# Altium PCB SymphonyLights_SOC v1.2.PcbDoc
Units mm, origin at the board's own origin, x right, y up, seen from the top; angles counter-clockwise.
Board outline 57 x 29 mm, 2 copper layers (Top Layer, Bottom Layer); 55 components, 26 nets, 150 pads, 149 vias.
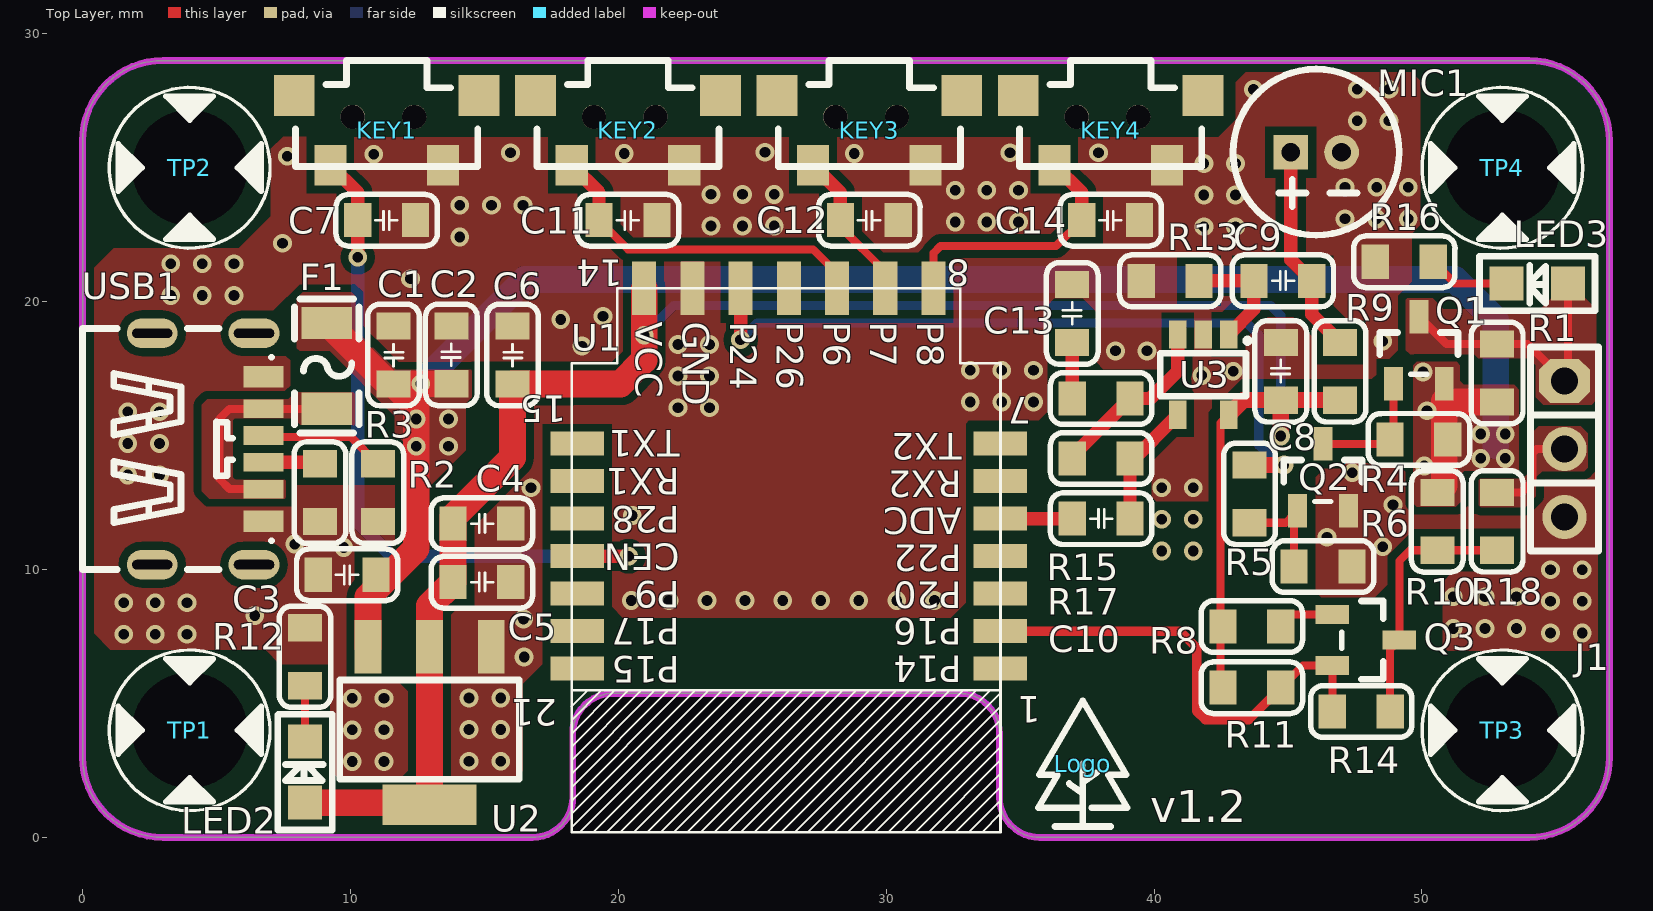
[diagram p0: Top Layer view]
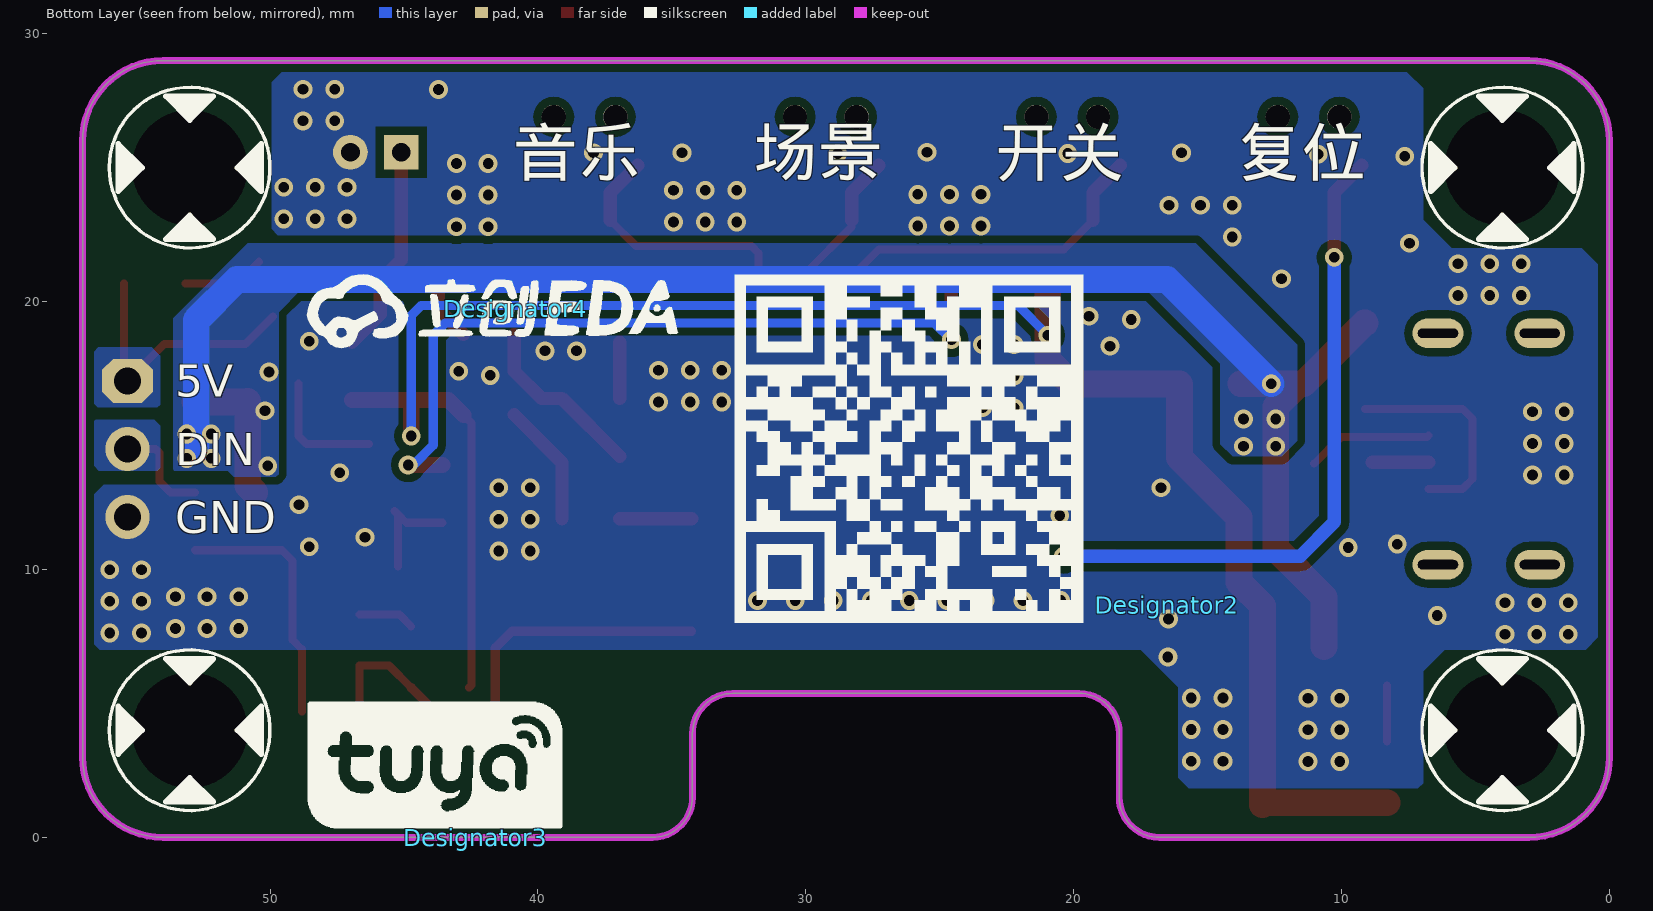
[diagram p1: Bottom Layer view, seen from below]

## Layer stack, top to bottom
Top Layer: signal copper 0.0356
Dielectric: dielectric 0.32, FR-4, Dk 4.8
Bottom Layer: signal copper 0.0356

## Board outline
3,0 16.8,0 ccw(c16.803,1.497) 18.3,1.504 18.3,3.873 cw(c19.797,3.88) 19.8,5.377 32.73,5.377 32.73,5.376 cw(c32.733,3.879) 34.23,3.872 34.23,1.503 ccw(c35.727,1.497) 35.73,-0.001 54,-0.001 54,0 ccw(c54,3) 57,3 57,26 ccw(c54,26) 54,29 3,29 ccw(c3,26) 0,26 0,3 ccw(c3,3)

## Design rules (kind name [scope] priority, off if disabled: settings)
Clearance [All] p1: gap=0.3
ComponentClearance [All] p1: gap=0 collisioncheckmode=3 verticalgap=0 showdistances=FALSE
HoleSize [All] p1: absolutevalues=TRUE maxlimit=100 minlimit=0.025 maxpercent=80.000 minpercent=20.000
MinimumSolderMaskSliver [All] p1: minsoldermaskwidth=0
PolygonConnect [All] p1: connectstyle=Direct reliefconductorwidth=0.254 reliefentries=4 polygonreliefangle="90 Angle"
RoutingVias [All] p1: holewidth=0.711 width=1.27 viastyle="Through Hole" minholewidth=0.3 minwidth=0.6 maxholewidth=0.711 maxwidth=1.27
SilkToSilkClearance [All] p1: silktosilkclearance=0
SilkscreenOverComponentPads [All] p1: minsilkscreentomaskgap=0
SolderMaskExpansion [All] p1: expansion=0.102
Width [All] p1: maxlimit=2 minlimit=0.3 preferedwidth=0.3
23 further rules are at their usual default settings.

## Classes and differential pairs
component class "SymphonyLights_SOC v1.1": C1 C2 C3 C4 C5 C6 C7 C8 C9 C10 C11 C12 C13 C14 F1 J1 KEY1 KEY2 KEY3 KEY4 LED2 LED3 MIC1 Q1 Q2 Q3 R1 R2 R3 R4 R5 R6 R8 R9 R10 R11 R12 R13 R14 R15 R16 R17 R18 TP1 TP2 TP3 TP4 U1 U2 U3 USB1

## Components (designator, comment, footprint, x,y, rotation, side; value= is the part's Value field where it differs from the comment)
C1 "100nF" 0805C 11.608,18.009 r270 top
C2 "22uF" 0805C 13.767,18.011 r90 top
C3 "100nF" 0805C 9.881,9.804 r180 top
C4 "100nF" 0805C 14.91,11.709 r0 top
C5 "22uF" 0805C 14.91,9.525 r0 top
C6 "100nF" 0805C 16.053,18.009 r270 top
C7 "100nF" 0805C 11.352,23.038 r180 top
C8 "1uF" 0805C 44.729,17.399 r90 top
C9 "1uF" 0805C 44.806,20.777 r0 top
C10 "0R" 0805C 38.024,11.898 r0 top
C11 "100nF" 0805C 20.361,23.038 r180 top
C12 "100nF" 0805C 29.37,23.038 r180 top
C13 "0R" 0805C 36.944,19.558 r90 top
C14 "100nF" 0805C 38.378,23.038 r180 top
Designator2 "Comment" 二维码 16.517,8.683 r180 bottom
Designator3 "Comment" TUYA_LOGO_2 42.316,0.012 r180 bottom
Designator4 "Comment" LOGO_LCEDA-实心 40.828,19.756 r180 bottom
F1 "0466005.NRHF" 1206F 9.119,17.6 r90 top
J1 "KF301-3P" "SIP3 - 2.54" 55.321,17.04 r270 top
KEY1 "RESET" KEY-SMD_4P-L7.8-W2.8-P4.20-EH 11.354,26.391 r0 top
KEY2 "场景" KEY-SMD_4P-L7.8-W2.8-P4.20-EH 20.362,26.391 r0 top
KEY3 "音乐" KEY-SMD_4P-L7.8-W2.8-P4.20-EH 29.371,26.391 r0 top
KEY4 "开关" KEY-SMD_4P-L7.8-W2.8-P4.20-EH 38.379,26.391 r0 top
LED2 "LED" 0805LED 8.306,1.295 r90 top
LED3 "LED" 0805LED 55.448,20.676 r180 top
Logo "Comment" LOGO 37.338,2.743 r0 top
MIC1 "GMI6050P-66DB" MIC-TH_BD6.0-P1.90-D0.4-L-RD 46.05,25.578 r0 top
Q1 "SI2301" SOT-23(SOT-23-3) 49.886,18.191 r0 top
Q2 "S8050" SOT-23(SOT-23-3) 46.304,13.437 r0 top
Q3 "S8050" SOT-23(SOT-23-3) 47.904,7.366 r270 top
R1 "0R NC" 0805R 52.807,16.256 r90 top
R2 "5.1K" 0805R 11.024,13.949 r270 top
R3 "5.1K" 0805R 8.865,13.949 r270 top
R4 "100K" 0805R 48.807,14.859 r0 top
R5 "1k" 0805R 43.561,13.904 r270 top
R6 "10K" 0805R 45.226,10.109 r0 top
R8 "2K±5%" 0805R 42.57,7.874 r0 top
R9 "10K" 0805R 46.939,16.319 r90 top
R10 "2K±5%" 0805R 50.571,12.875 r270 top
R11 "2K±5%" 0805R 42.57,5.588 r0 top
R12 "1K" 0805R 8.306,5.664 r90 top
R13 "1K" 0805R 39.522,20.777 r0 top
R14 "NC/0R" 0805R 46.655,4.699 r0 top
R15 "1K" 0805R 36.944,16.383 r0 top
R16 "1K" 0805R 50.419,21.488 r180 top
R17 "100K" 0805R 36.944,14.14 r0 top
R18 "1K" 0805R 52.807,10.719 r90 top
TP1 "" M3螺丝孔 4,4 r0 top
TP2 "" M3螺丝孔 4,25 r0 top
TP3 "" M3螺丝孔 53,4 r0 top
TP4 "" M3螺丝孔 53,25 r0 top
U1 "WIFI_BLE_CBU" WIFI_BLE_CBU 26.365,20.498 r180 top
U2 "AMS1117-3.3" SOT-223 12.954,4.166 r180 top
U3 "LM321" SOT-23-5 41.834,17.271 r270 top
USB1 "TYPE-C 6P" TYPE-C-SMD_TYPE-C-6P 4.503,14.5 r270 top

## Footprints (in the part's own frame and the unit in brackets; to place one, negate y for a bottom-side part, rotate by r counter-clockwise, add the part's x,y. Pads: shape width x height; smd on the part's side, far side on the other; paste and mask are expansions set on the pad)
0805C [mil]
  rect 40x50 smd: 1(-42.5,0) 2(42.5,0)
  silkscreen extent -75,-38 75,38, body extent -39,-25 39,25, height 30
0805LED [mil]
  rect 50x50 smd: 1(0,0) 2(90,0)
  silkscreen extent -40,-40 130,40, body extent 6,-25 84,24, height 30
0805R [mil]
  rect 40x50 smd: 1(0,0) 2(85,0)
  silkscreen extent -32,-38 117,38, body extent 3,-25 81,25, height 22
1206F [mm]
  rect 1.2x1.9 smd: 1(-1.6,0) 2(1.6,0)
  silkscreen extent -2.5,-1.2 2.5,1.2
KEY-SMD_4P-L7.8-W2.8-P4.20-EH [mil]
  rect 47.2x60 smd: 1(-82.7,-51.15) 2(82.7,-51.15)
  rect 60x60 smd: 3(-135.8,51.15) 3(135.8,51.15)
  round 35.43 hole 35.43 unplated: ""(-50,19.95) ""(40.55,19.95)
  silkscreen extent -134,-53 134,103
LOGO [mm]
  silkscreen extent -1.66,-2.34 1.66,2.36
LOGO_LCEDA-实心 [mm]
  silkscreen extent -7.77,-1.49 6.06,1.25
M3螺丝孔 [mm]
  round 3.5 hole 4.3 unplated: ""(0,0)
  Top Layer pour cut-out: -3.048,0 -2.751,-1.302 -1.918,-2.345 -0.716,-2.925 0.62,-2.925 1.822,-2.345 2.655,-1.302 2.952,0 2.952,0 2.655,1.302 1.822,2.345 0.62,2.925 -0.716,2.925 -1.918,2.345 -2.751,1.302 -3.048,0
  Bottom Layer pour cut-out: -3.048,0 -2.751,-1.302 -1.918,-2.345 -0.716,-2.925 0.62,-2.925 1.822,-2.345 2.655,-1.302 2.952,0 2.952,0 2.655,1.302 1.822,2.345 0.62,2.925 -0.716,2.925 -1.918,2.345 -2.751,1.302 -3.048,0
  silkscreen extent -3,-3 3,3
MIC-TH_BD6.0-P1.90-D0.4-L-RD [mm]
  rect 1.3x1.3 hole 0.7: 1(-0.95,0)
  round 1.3 hole 0.7: 2(0.95,0)
  silkscreen extent -3.1,-3.1 3.1,3.1
"SIP3 - 2.54" [mil]
  oct 65x75 hole 39.37: 1(0,0)
  round 65 hole 39.37: 2(100,0) 3(200,0)
  silkscreen extent -50,-50 250,50
SOT-23(SOT-23-3) [mm]
  rect 0.7x1.25 smd: 1(-0.95,-1.25) 2(0.95,-1.25) 3(0,1.25)
  silkscreen extent -1.46,-0.9 1.46,0.65
SOT-23-5 [mm]
  rect 1.06x0.65 smd: 1(-1.5,0.95) 2(-1.5,0) 3(-1.5,-0.95) 4(1.5,-0.95) 5(1.5,0.95)
  silkscreen extent -1.33,-1.6 0.8,1.71
SOT-223 [mm]
  rect 1x2 smd: 1(-2.3,-2.95) 2(0,-2.95) 3(2.3,-2.95)
  rect 3.5x1.5 smd: 2(0,2.95)
  silkscreen extent -3.35,-1.71 3.35,1.99, body extent -3.29,-3.55 3.21,3.41, height 1.65
TUYA_LOGO_2 [mm]
  silkscreen extent -6.27,0.33 3.23,5.03
TYPE-C-SMD_TYPE-C-6P [mm]
  oval 1.1x1.899 hole 0.35 slot 1.5 at 90 deg: 7(-4.32,1.9) 7(-4.32,-1.9) 7(4.32,-1.9) 7(4.32,1.9)
  rect 0.7x1.5 smd: A5(-0.5,2.249) A9(1.5,2.249) B5(0.5,2.249) B9(-1.5,2.249)
  rect 0.8x1.5 smd: A12(2.7,2.249) B12(-2.7,2.249)
  silkscreen extent -4.5,-4.5 4.5,2.55
WIFI_BLE_CBU [mm]
  rect 2x0.9 smd: 1(-7.9,14.2) 2(-7.9,12.8) 3(-7.9,11.4) 4(-7.9,10) 5(-7.9,8.6) 6(-7.9,7.2) 7(-7.9,5.8) 15(7.9,5.8) 16(7.9,7.2) 17(7.9,8.6) 18(7.9,10) 19(7.9,11.4) 20(7.9,12.8) 21(7.9,14.2)
  rect 0.9x2 smd: 8(-5.4,0) 9(-3.6,0) 10(-1.8,0) 11(0,0) 12(1.8,0) 13(3.6,0) 14(5.4,0)
  silkscreen extent -7.9,0 8.14,20.33
二维码 [mm]
  silkscreen extent -16.13,-0.66 -3.12,12.29

## Part data
C2 C3 C4 C5: library part CAP, "Capacitor"
C8 C9 C10 C13: library part 100nF
J1: library part CON3, "Connector"
R1 R4 R5 R6: library part Res2, "Resistor"
R2 R3 R13 R15 R17: library part 10K
R8 R10 R11 R12 R14 R16 R18: library part RES5
U1: "Module"
U2: library part GM1117
USB1: library part "TYPE-C 6P(073)"

## Via types
v1: diameter 0.7, hole 0.4, Top Layer to Bottom Layer, tented both sides, 149 vias

## Nets (pads, with @x,y where several pads share a name; then routed paths per layer and width w, separated by ;. In a path a pad name is that pad's centre, name@x,y a point inside that pad or via, vN(x,y) a via of type N, cw(c..) or ccw(c..) an arc to the next point about the centre after c; other vN are vias at no path point)
3V3: C4.1 C5.1 C6.2 C8.1 LED2.1 R8.1 R9.1 R11.1 U1.14 U2.2 U3.5 | length 74.5
  Top Layer w0.3: R11.1 42.476,5.682 42.476,15.463 U3.5
  Top Layer w0.6: U3.5 43.332,16.319 C8.1 ; v1(44.729,14.986) C8.1 ; R9.1 C8.1
  Top Layer w1: LED2.1 U2.2@12.874,1.295 ; U2.2@12.954,1.216 12.954,7.116 12.954,8.649 C5.1 C4.1 13.83,11.951 16.053,14.173 C6.2 20.079,16.929 20.965,17.816 v1(20.965,18.745) U1.14
  Bottom Layer w0.35: v1(20.965,18.745) 22.073,19.853 44.358,19.853 44.729,19.482 v1(44.729,14.986)
5V: C1.2 C2.1 C3.1 F1.2 Q1.2 R1.1 R4.2 R10.1 U2.3 | length 69
  Top Layer w1: F1.2 9.146,19.2 11.415,16.932 v1(12.624,16.932) C2.1 ; U2.3 10.654,8.978 12.459,10.782 12.459,16.078 C1.2 ; R10.1 50.836,13.139 50.836,16.281 50.861,16.256 R1.1
  Bottom Layer w1: v1(12.624,16.932) 16.52,20.828 51.232,20.828 52.756,19.304 52.756,14.63
  other v1: 50.089,13.868 52.197,14.148 53.111,14.148 12.459,14.605 13.665,14.605 52.197,15.062 53.111,15.062 12.459,15.621 13.665,15.621 50.19,15.926 50.038,17.374
DIN_3V3: Q3.2 R11.2 R14.1 U1.2 | length 17.7
  Top Layer w0.3: R11.2 45.557,6.416 Q3.2 R14.1
  Top Layer w0.35: U1.2 40.969,7.698 41.587,7.079 41.587,4.717 41.91,4.394 43.536,4.394 R11.2
DIN_5V: Q3.3 R10.2 R14.2 R18.1 | length 9.6
  Top Layer w0.3: R14.2 48.814,7.026 Q3.3 49.154,10.317 49.555,10.719 R18.1
GND: C1.1 C2.2 C3.2 C4.2 C5.2 C6.1 C7.1 C8.2 C11.1 C12.1 C13.2 C14.1 J1.3 KEY1.2 KEY2.2 KEY3.2 KEY4.2 MIC1.2 Q2.2 R2.2 R3.2 R6.2 R12.2 R13.1 R16.2 U1.13 U2.1 U3.2 USB1.A12 USB1.B12
  other v1: 10.071,2.832 11.252,2.832 14.427,2.845 15.608,2.845 10.071,4.013 11.252,4.013 14.427,4.026 15.608,4.026 10.071,5.194 11.252,5.194 14.427,5.207 15.608,5.207 16.485,6.731 1.537,7.582 2.718,7.582 3.899,7.582 54.8,7.633 55.982,7.633 51.168,7.798 52.349,7.798 53.53,7.798 16.459,8.153 6.426,8.28 1.537,8.763 2.718,8.763 3.899,8.763 54.8,8.814 55.982,8.814 20.479,8.839 21.895,8.839 23.311,8.839 24.727,8.839 26.143,8.839 27.559,8.839 28.975,8.839 30.391,8.839 31.807,8.839 51.168,8.979 52.349,8.979 53.53,8.979 54.8,9.995 55.982,9.995 40.284,10.693 41.465,10.693 9.754,10.82 48.539,10.846 7.925,10.947 46.457,11.201 40.284,11.874 41.465,11.874 20.523,12.014 48.92,12.421 16.739,13.056 40.284,13.056 41.465,13.056 1.689,13.525 2.87,13.525 47.396,13.614 1.689,14.707 2.87,14.707 1.689,15.888 2.87,15.888 22.225,16.04 23.406,16.04 33.134,16.256 34.315,16.256 35.496,16.256 22.225,17.221 23.406,17.221 41.783,17.247 42.951,17.399 33.134,17.437 34.315,17.437 35.496,17.437 38.557,18.161 39.738,18.161 18.644,18.339 22.225,18.402 23.406,18.402 48.539,18.517 17.856,19.329 19.431,19.456 3.289,20.231 4.47,20.231 5.651,20.231 12.243,20.853 3.289,21.412 4.47,21.412 5.651,21.412 7.468,22.174 14.084,22.415 41.859,22.796 43.04,22.796 23.457,22.822 24.638,22.822 25.819,22.822 32.575,22.974 33.757,22.974 34.938,22.974 47.13,23.089 48.311,23.089 49.492,23.089 14.084,23.597 15.265,23.597 16.447,23.597 41.859,23.978 43.04,23.978 23.457,24.003 24.638,24.003 25.819,24.003 32.575,24.155 33.757,24.155 34.938,24.155 47.13,24.27 48.311,24.27 49.492,24.27 41.859,25.159 43.04,25.159 7.645,25.425 10.871,25.502 20.218,25.527 28.804,25.527 15.977,25.552 34.62,25.552 37.922,25.552 25.476,25.578 47.587,26.746 48.768,26.746 43.713,27.915 47.587,27.927 48.768,27.927
MIC: C10.1 U1.5 | length 2.7
  Top Layer w0.5: U1.5 C10.1
NetC9_1: C9.1 R13.2 U3.1 | length 4.4
  Top Layer w0.5: R13.2 C9.1 43.726,19.713 U3.1
NetC9_2: C9.2 MIC1.1 R9.2 | length 7.9
  Top Layer w0.5: MIC1.1 45.1,21.562 C9.2 45.885,19.533 R9.2
NetC10_2: C10.2 R17.2 U3.4 | length 4.6
  Top Layer w0.5: C10.2 39.103,13.99 U3.4
NetC13_1: C13.1 R15.1 | length 2.1
  Top Layer w0.5: R15.1 C13.1
NetF1_1: F1.1 USB1.A9 USB1.B9 | length 8.2
  Top Layer w0.3: USB1.A9 5.491,13 5.105,13.386 5.105,15.614 5.491,16 USB1.B9 F1.1
NetJ1_2: J1.2 R18.2 | length 3.8
  Top Layer w0.3: R18.2 53.721,12.878 54.127,13.284 54.127,14.348 54.28,14.5 J1.2
NetLED2_2: LED2.2 R12.1 | length 2.1
  Top Layer w0.3: LED2.2 R12.1
NetLED3_2: LED3.2 R16.1 | length 3.1
  Top Layer w0.3: R16.1 51.232,20.676 LED3.2
NetQ1_1: Q1.1 Q2.3 R4.1 | length 4.7
  Top Layer w0.3: Q2.3 48.635,14.686 48.936,14.987 Q1.1
NetQ2_1: Q2.1 R5.2 R6.1 | length 3.9
  Top Layer w0.3: R5.2 44.913,11.745 Q2.1@45.226,12.059 ; R6.1 Q2.1@45.226,12.059 ; Q2.1 Q2.1@45.226,12.059
NetQ3_1: Q3.1 R8.2 | length 2.1
  Top Layer w0.3: R8.2 45.171,8.316 Q3.1
NetR2_1: R2.1 USB1.A5 | length 4.7
  Top Layer w0.3: USB1.A5 6.802,14.95 10.023,14.95 R2.1
NetR3_1: R3.1 USB1.B5 | length 2.1
  Top Layer w0.5: USB1.B5 R3.1@8.865,14
NetR15_2: R15.2 R17.1 U3.3 | length 6.6
  Top Layer w0.5: R17.1@36.944,14.224 R15.2 39.863,16.383 40.883,17.403 U3.3
OUT_5V: J1.1 LED3.1 Q1.3 R1.2 | length 10.1
  Top Layer w0.3: Q1.3 50.912,18.415 R1.2 53.946,18.415 J1.1 55.448,17.167 LED3.1
P6: C11.2 KEY2.1 U1.10 | length 12.7
  Top Layer w0.3: C11.2 20.366,21.953 27.272,21.953 28.165,21.06 U1.10
  Top Layer w0.5: KEY2.1 19.282,24.072 C11.2
P7: C12.2 KEY3.1 U1.9 | length 5.7
  Top Layer w0.3: C12.2 28.29,22.789 29.965,21.114 U1.9
  Top Layer w0.5: KEY3.1 28.29,24.072 C12.2
P8: C14.2 KEY4.1 U1.8 | length 9.8
  Top Layer w0.3: U1.8 31.765,21.808 32.029,22.073 36.333,22.073 C14.2
  Top Layer w0.5: KEY4.1 37.299,24.072 C14.2
POWER: R5.1 U1.12 | length 28.4
  Top Layer w0.5: v1(24.565,18.574) U1.12
  Top Layer w0.6: R5.1 v1(44.846,13.904)
  Bottom Layer w0.35: v1(24.565,18.574) 25.194,19.203 43.459,19.203 43.904,18.757 43.904,14.644 44.644,13.904 v1(44.846,13.904)
RST: C7.2 KEY1.1 U1.18 | length 26.3
  Top Layer w0.5: KEY1.1 10.273,24.072 C7.2 v1(10.273,21.655) ; U1.18 v1(20.389,10.498)
  Bottom Layer w0.5: v1(10.273,21.655) 10.273,11.774 11.549,10.498 v1(20.389,10.498)
pads on no net: KEY1. KEY1.3 KEY2. KEY2.3 KEY3. KEY3.3 KEY4. KEY4.3 TP1. TP2. TP3. TP4. U1.1 U1.3 U1.4 U1.6 U1.7 U1.11 U1.15 U1.16 U1.17 U1.19 U1.20 U1.21 USB1.7

## Polygon pours and split planes (outlines as drawn)
GND on Top Layer "Keep-Out Layer-No Net" (solid, pour order 1000): 3,0 16.8,0 ccw(c16.803,1.497) 18.3,1.504 18.3,3.873 cw(c19.797,3.88) 19.8,5.377 32.73,5.377 32.73,5.376 cw(c32.733,3.879) 34.23,3.872 34.23,1.503 ccw(c35.727,1.497) 35.73,-0.001 54,-0.001 54,0 ccw(c54,3) 57,3 57,26 ccw(c54,26) 54,29 3,29 ccw(c3,26) 0,26 0,3 ccw(c3,3)
NetF1_1 on Top Layer "Top Layer-No Net" (solid, pour order 1000): 7.899,15.646 8.153,15.392 10.135,15.392 10.16,15.418 10.16,16.561 10.109,16.612 7.925,16.612 7.671,16.358 4.648,16.358 4.445,16.154 4.445,12.929 4.724,12.649 7.544,12.649 7.595,12.7 7.595,13.31 7.544,13.36 5.69,13.36 5.613,13.437 5.613,15.57 5.69,15.646
5V on Top Layer "Top Layer-No Net" (solid, pour order 1001): 8.23,20.345 10.058,20.345 10.185,20.218 10.185,18.948 11.684,17.45 14.503,17.45 14.529,17.424 14.529,16.434 14.3,16.205 14.3,14.453 12.459,12.611 12.459,14.288 11.659,15.088 11.659,15.723 9.22,18.161 8.103,18.161 8.001,18.263 8.001,20.117
5V on Top Layer "Top Layer-No Net" (solid, pour order 1002): 53.365,16.891 51.562,16.891 51.41,17.043 51.41,17.628 51.283,17.755 50.317,17.755 49.809,17.755 49.682,17.628 49.682,12.471 49.809,12.344 51.257,12.344 51.46,12.548 51.46,13.564 51.562,13.665 51.587,13.691 53.264,13.691 53.594,13.691 53.619,13.716 53.619,16.713 53.518,16.815 53.442,16.891 53.365,16.891
OUT_5V on Top Layer "Top Layer-No Net" (solid, pour order 1003): 49.454,20.117 49.403,20.066 49.403,18.186 49.555,18.034 51.943,18.034 52.095,17.882 54,17.882 54.254,17.628 54.254,16.434 54.534,16.154 56.337,16.154 56.515,16.332 56.515,19.71 55.778,20.447 55.143,20.447 54.407,19.71 50.8,19.71 50.394,20.117
NetJ1_2 on Top Layer "Top Layer-No Net" (solid, pour order 1004): 54.356,15.342 53.924,14.91 53.924,13.564 53.746,13.386 52.172,13.386 52.121,13.335 52.121,12.395 52.197,12.319 53.848,12.319 54.254,12.725 54.254,13.437 54.483,13.665 56.058,13.665 56.185,13.792 56.185,15.088 55.931,15.342
NetJ1_2 on Bottom Layer "Bottom Layer-No Net" (solid, pour order 1001): 54.204,13.691 56.388,13.691 56.566,13.868 56.566,15.545 56.515,15.596 54.331,15.596 54.102,15.367 54.102,13.792
OUT_5V on Bottom Layer "Bottom Layer-No Net" (solid, pour order 1000): 54.305,18.288 54.102,18.085 54.102,16.154 54.204,16.053 56.439,16.053 56.667,16.281 56.667,18.034 56.413,18.288
GND on Bottom Layer "Keep-Out Layer-No Net" (solid, pour order 1000): 3,0 16.8,0 ccw(c16.803,1.497) 18.3,1.504 18.3,3.873 cw(c19.797,3.88) 19.8,5.377 32.73,5.377 32.73,5.376 cw(c32.733,3.879) 34.23,3.872 34.23,1.503 ccw(c35.727,1.497) 35.73,-0.001 54,-0.001 54,0 ccw(c54,3) 57,3 57,26 ccw(c54,26) 54,29 3,29 ccw(c3,26) 0,26 0,3 ccw(c3,3)
5V on Bottom Layer "Top Layer-No Net" (solid, pour order 1005): 51.359,13.462 49.784,13.462 49.682,13.564 49.682,19.609 48.844,20.447 17.297,20.447 14.529,17.678 14.529,14.681 14.072,14.224 12.243,14.224 11.659,14.808 11.659,18.39 15.443,22.174 50.825,22.174 53.619,19.38 53.619,13.743 53.567,13.691 51.587,13.691

## Keep-outs
Keep-Out Layer:
  the board outline again, w0.254

## Other copper
Top Layer:
  pour cut-out: 1.163,21.991 0.127,20.955 0.127,26.797 2.083,28.753 44.323,28.753 44.475,28.6 43.459,28.6 43.053,28.194 43.053,26.79 42.404,26.141 8.366,26.141 8.354,26.153 7.484,26.153 7.036,25.705 7.036,23.19 5.836,21.991
  pour cut-out: 32.965,8.759 32.965,15.448 33.088,15.57 35.688,15.57 36.009,15.892 36.009,19.855 36.271,20.117 37.338,20.117 37.854,19.601 37.846,17.755 38.1,17.475 41.351,17.475 41.444,16.666 41.509,16.601 41.509,15.118 41.351,14.961 40.867,14.961 39.909,14.003 39.909,12.72 40.081,12.548 42.009,12.548 42.017,12.556 42.017,15.869 43.275,17.127 48.134,17.127 48.286,17.279 48.286,17.867 48.778,17.867 49.097,18.186 49.377,17.907 49.377,13.641 49.047,13.97 47.163,13.97 46.954,13.761 46.349,13.761 46.034,13.446 46.034,9.174 46.242,8.966 48.234,8.966 48.695,9.427 48.695,10.508 49.712,11.524 53.739,11.524 53.739,9.913 53.742,9.911 53.739,9.908 51.158,9.908 50.775,9.525 50.775,7.163 50.965,6.972 56.223,6.972 56.642,7.391 56.642,1.88 54.94,0.178 35.408,0.178 34.188,1.397 34.188,4.699 33.249,5.639 19.101,5.639 18.009,4.547 18.009,0.991 17.094,0.076 15.501,0.076 15.004,0.573 15.004,2.266 16.21,2.266 16.434,2.489 16.434,5.74 17.165,6.472 17.165,9.723 17.374,9.931 18.44,9.931 20.168,8.204 32.41,8.204
  pour cut-out: 7.544,16.663 7.747,16.866 7.747,17.805 7.59,17.963 6.802,17.963 6.802,19.677 7.129,19.677 8.103,20.651 10.185,20.651 10.491,20.345 10.491,19.075 11.811,17.756 19.764,17.756 20.158,18.15 20.158,21.835 20.168,21.844 31.201,21.844 31.341,21.984 32.36,20.966 32.36,19.507 32.05,19.198 25.126,19.198 23.815,20.509 23.815,21.494 20.529,21.494 20.422,21.387 20.422,18.186 18.356,16.121 16.86,16.121 13.88,13.141 8.01,13.141 7.9,13.031 7.9,12.448 7.802,12.35 4.731,12.35 4.724,12.343 4.724,16.205 5.183,16.663
  pour cut-out: 49.611,20.742 49.611,22.535 49.943,22.866 49.943,28.238 49.479,28.702 55.016,28.702 56.667,27.051 56.667,21.895 54.789,20.016 50.494,20.016 50.394,20.117 49.454,20.117 49.403,20.066 49.097,20.066 49.097,20.228
  pour cut-out: 43.409,18.603 44.237,19.431 45.194,19.431 46.954,17.671 47.874,17.671 47.874,19.286 47.249,19.286 46.693,19.842 46.693,21.712 42.918,21.712 42.918,19.982 42.494,19.558 42.494,19.517
  pour cut-out: 6.834,7.009 7.371,6.472 9.241,6.472 9.241,2.519 9.495,2.266 11.918,2.266 12.141,2.489 12.141,5.461 11.787,5.816 11.454,5.816 11.454,8.636 12.905,10.087 12.905,9.501 12.395,8.992 12.395,2.235 10.516,0.356 1.651,0.356 0.203,1.803 0.203,7.595 0.33,7.722 1.043,7.009
Bottom Layer:
  pour cut-out: 49.943,22.714 49.682,22.454 50.979,22.454 53.619,19.813 53.619,13.743 53.567,13.691 51.893,13.691 51.359,13.156 56.211,13.156 56.566,12.802 56.718,12.954 56.718,13.487 56.642,13.564 54.331,13.564 54.102,13.792 54.102,17.983 54.407,18.288 56.413,18.288 56.744,17.958 56.744,27.102 55.281,28.565 49.566,28.565 49.943,28.188
  pour cut-out: 1.036,21.991 5.887,21.991 6.961,23.065 6.961,27.967 7.569,28.575 1.194,28.575 0.127,27.508 0.127,21.59 0.381,21.336
  pour cut-out: 16.104,5.613 17.499,7.009 56.361,7.009 56.565,7.212 56.565,1.65 55.093,0.178 35.128,0.178 34.62,0.686 34.62,4.267 33.452,5.436 19.025,5.436 18.313,4.724 18.313,1.067 17.399,0.152 2.083,0.152 0.152,2.083 0.152,7.747 0.89,7.009 6.148,7.009 6.961,6.196 6.961,2.03 7.163,1.829 15.697,1.829 16.104,2.235

## Silkscreen, mask and mechanical layers (free items; w line width, h text height)
Top Overlay:
  text "v1.2" at 39.853,0.559 h1.2
Bottom Overlay:
  text "场景" at 31.946,24.151 h3
  text "复位" at 13.901,24.136 h3
  text "开关" at 22.93,24.136 h3
  text "音乐" at 40.914,24.13 h3
  text "5V" at 53.543,16.44 h1.2
  text "DIN" at 53.543,13.9 h1.2
  text "GND" at 53.543,11.36 h1.2

## Dimensions
0,26 to 57,26 on Top Overlay
3,0 to 3,29 on Top Overlay

## Text inside footprints (layer, text, board x,y; h text height)
U1: Top Overlay "15" at 18.059,16.485 h1 r180; Top Overlay "14" at 20.168,21.565 h1 r180; Top Overlay "8" at 33.122,21.565 h1 r180; Top Overlay "7" at 35.41,16.428 h1 r180; Top Overlay "P8" at 31.166,19.253 h1 r270; Top Overlay "P7" at 29.413,19.253 h1 r270; Top Overlay "P6" at 27.672,19.253 h1 r270; Top Overlay "P26" at 25.924,19.253 h1 r270; Top Overlay "P24" at 24.171,19.253 h1 r270; Top Overlay "1" at 35.765,5.278 h1 r180; Top Overlay "21" at 17.729,5.156 h1 r180; Top Overlay "P14" at 32.817,6.778 h1 r180; Top Overlay "P16" at 32.817,8.176 h1 r180; Top Overlay "P20" at 32.817,9.542 h1 r180; Top Overlay "P22" at 32.817,10.925 h1 r180; Top Overlay "ADC" at 32.817,12.307 h1 r180; Top Overlay "RX2" at 32.817,13.689 h1 r180; Top Overlay "TX2" at 32.817,15.088 h1 r180; Top Overlay "VCC" at 20.65,19.252 h1 r270; Top Overlay "GND" at 22.403,19.253 h1 r270; Top Overlay "TX1" at 22.3,15.189 h1 r180; Top Overlay "RX1" at 22.3,13.786 h1 r180; Top Overlay "P28" at 22.3,12.368 h1 r180; Top Overlay "CEN" at 22.3,10.965 h1 r180; Top Overlay "P9" at 22.3,9.562 h1 r180; Top Overlay "P17" at 22.3,8.175 h1 r180; Top Overlay "P15" at 22.3,6.756 h1 r180